# Altium PCB lab.PcbDoc
Units mm, origin at the board's own origin, x right, y up, seen from the top; angles counter-clockwise.
Board outline 122.94 x 74.3 mm, 2 copper layers (Top Layer, Bottom Layer), stack 1.1 mm thick; 25 components, 16 nets, 57 pads, 4 vias.
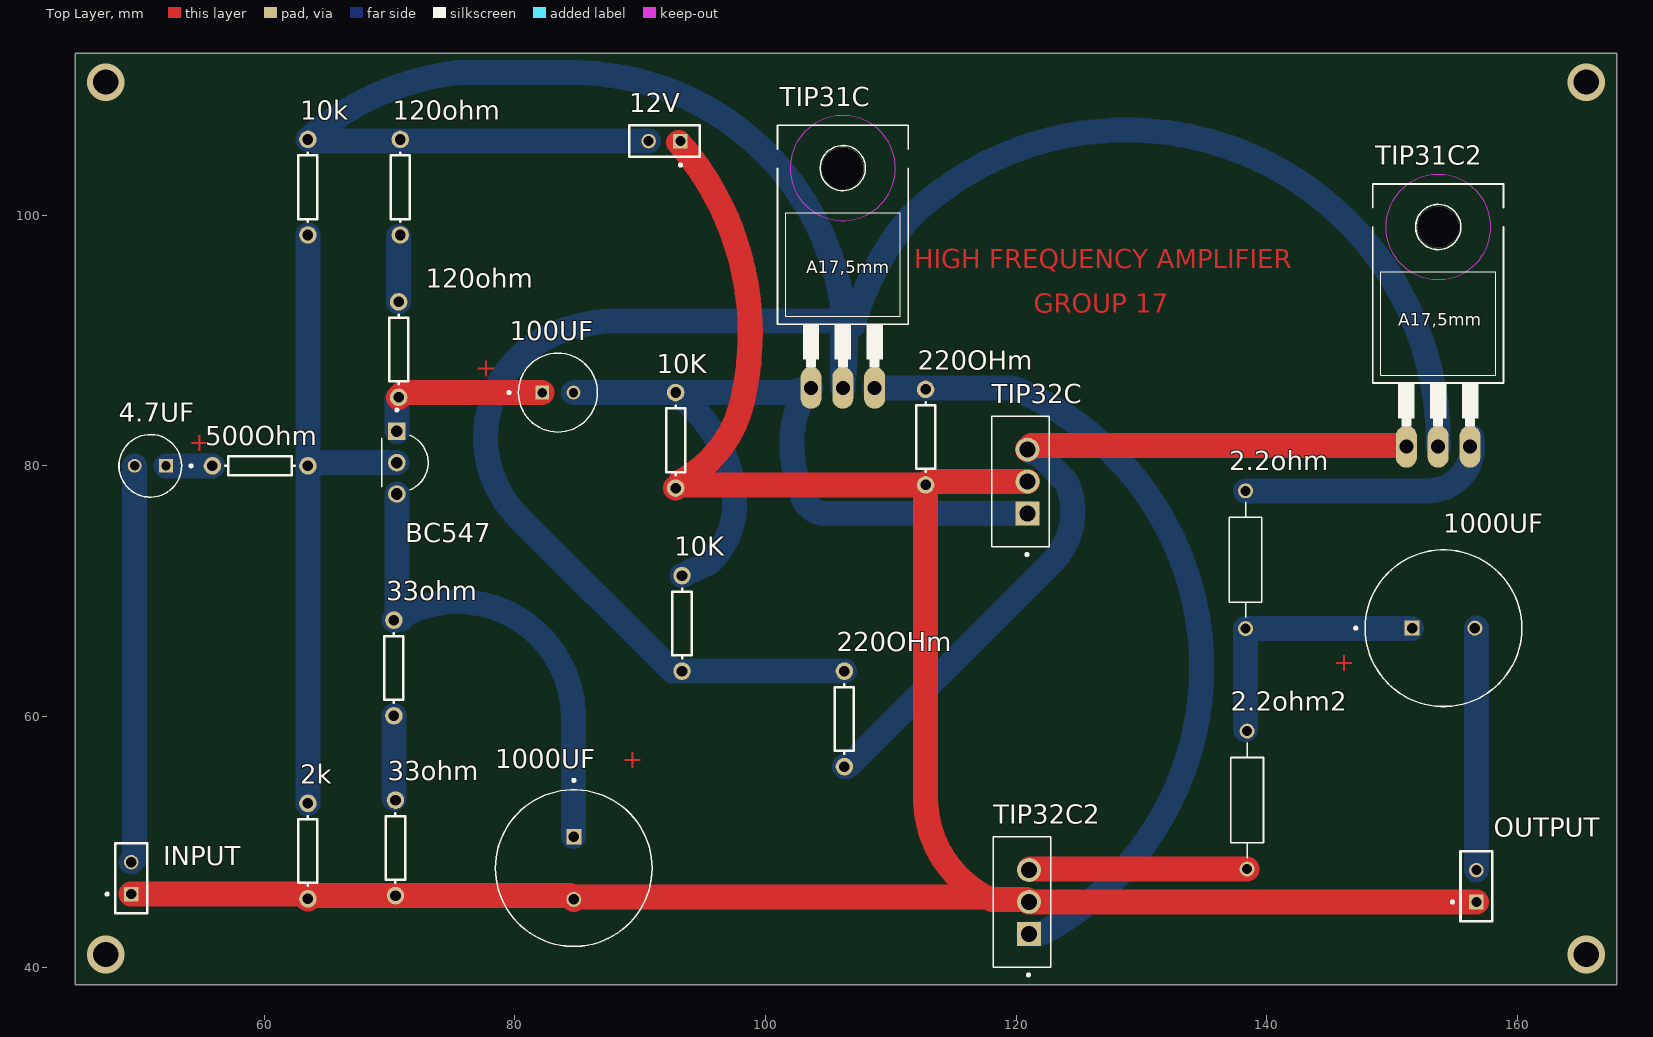
[diagram p0: Top Layer view]
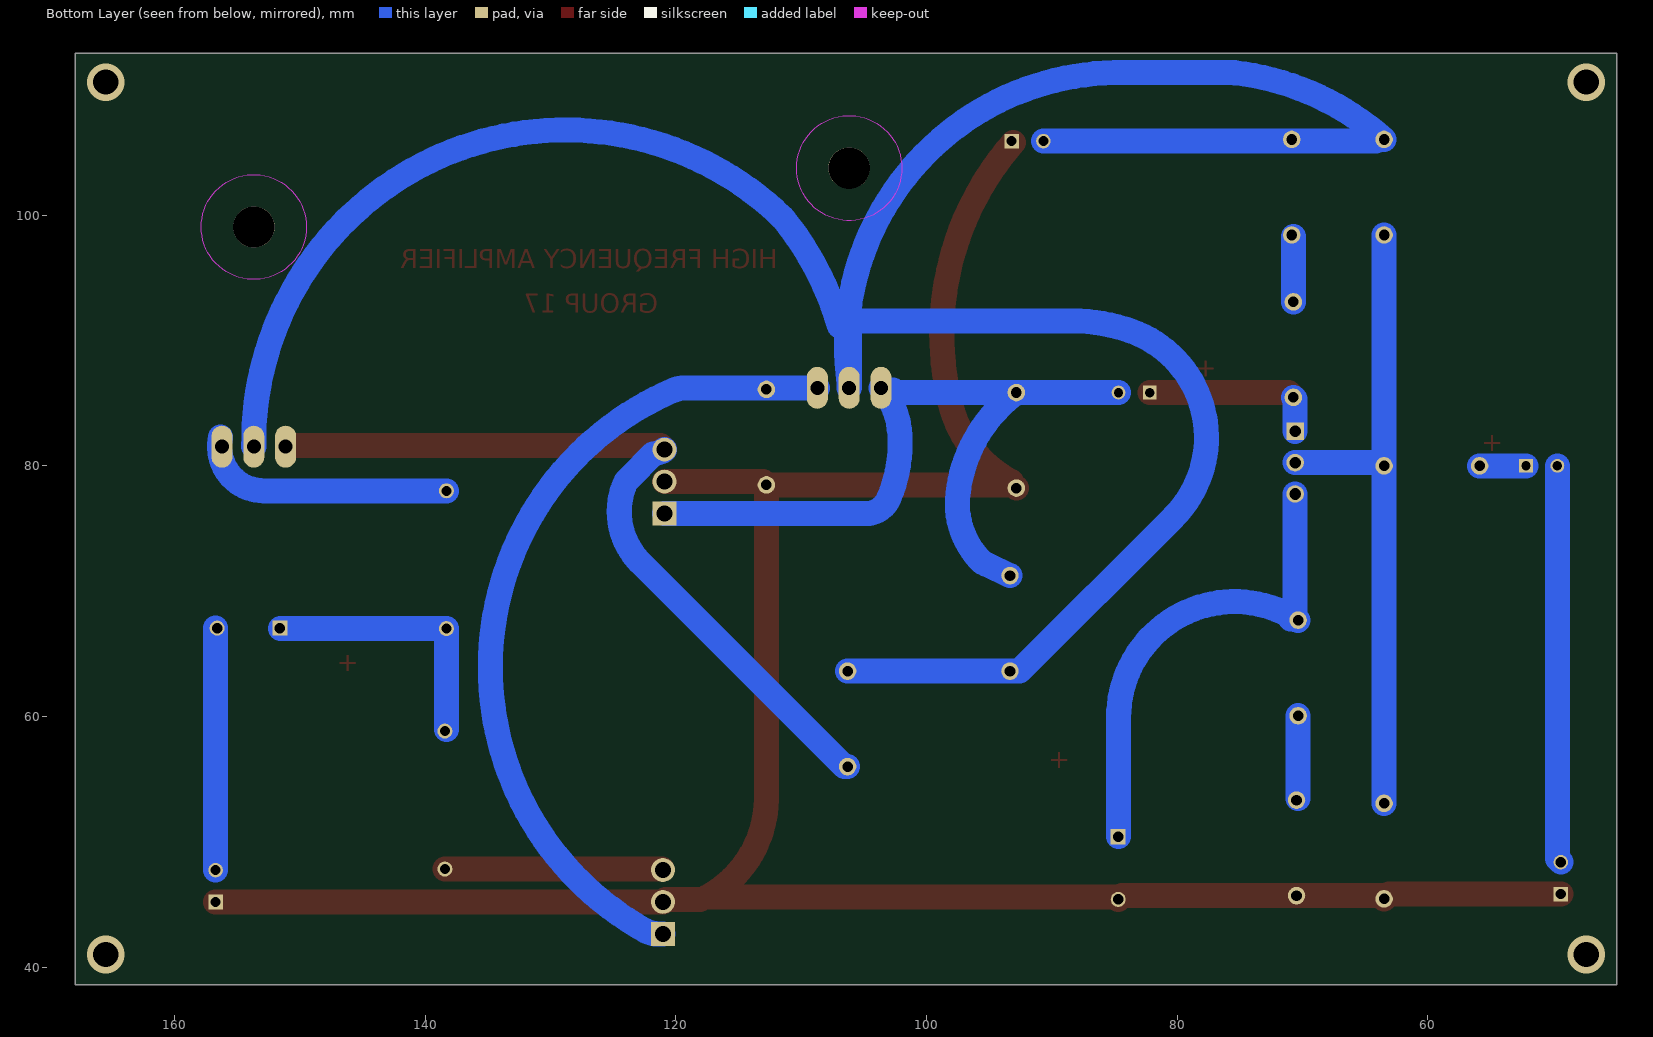
[diagram p1: Bottom Layer view, seen from below]

## Layer stack, top to bottom
Top Solder: solder mask 0.05, Solder Resist, Dk 3.5
Top Layer: signal copper 0.1
Dielectric 1: dielectric 0.9, FR-4, Dk 4.8
Bottom Layer: signal copper 0.1
Bottom Solder: solder mask 0.05, Solder Resist, Dk 3.5

## Board outline
44.958,38.608 167.894,38.608 167.894,112.903 44.958,112.903

## Design rules (kind name [scope] priority, off if disabled: settings)
Clearance [All] p1: gap=0.241 ignorepadtopadclearanceinfootprint=FALSE
HoleSize [All] p1: absolutevalues=TRUE maxlimit=3.302 minlimit=0.025 maxpercent=80.000 minpercent=20.000
PolygonConnect [All] p1: connectstyle=Relief reliefconductorwidth=0.254 reliefentries=4 polygonreliefangle="90 Angle" airgapwidth=0.254
RoutingVias [All] p1: holewidth=1 width=2 viastyle="Through Hole" minholewidth=0.25 minwidth=0.25 maxholewidth=2 maxwidth=3
SilkToSilkClearance [All] p1: silktosilkclearance=0.133
SilkToSolderMaskClearance [IsPad] p1: minsilkscreentomaskgap=0 clearancetoexposedcopper=TRUE
SolderMaskExpansion [All] p1: expansion=0.102 istentingtop=FALSE
Width [All] p1: maxlimit=2 minlimit=0.1 preferedwidth=2
27 further rules are at their usual default settings.

## Classes and differential pairs
component class lab: 2.2ohm 2.2ohm2 2k 4.7UF 10K 10k 12V 33ohm 100UF 120ohm 220OHm 500Ohm 1000UF BC547 input OUTPUT TIP31C TIP31C2 TIP32C TIP32C2

## Components (designator, comment, footprint, x,y, rotation, side; value= is the part's Value field where it differs from the comment)
2.2ohm "MFR-25FBF52-196K" RESAD1100W55L680D260 138.303,72.517 r90 top
2.2ohm2 "MFR-25FBF52-196K" RESAD1100W55L680D260 138.43,53.34 r90 top
2k "Res3" AXIAL-0.3 63.5,49.276 r90 top value=2K
4.7UF "EEUEB1J4R7H" CAPPRD250W50D500H1500 50.927,80.01 r180 top
10k "Res2" AXIAL-0.3 63.5,102.235 r90 top value=10K
10K "Res9" AXIAL-0.3 92.837,82.042 r90 top value=10K
10K "Res8" AXIAL-0.3 93.345,67.437 r270 top value=10K
12V "CES-101-01-G-D" SAMTEC_CES-101-01-G-D 93.218,105.918 r90 top
33ohm "Res5" AXIAL-0.3 70.485,49.53 r90 top value=33ohm
33ohm "Res4" AXIAL-0.3 70.358,63.881 r90 top value=33ohm
100UF "EEUEB1E101" CAPPRD250W50D630H1500 83.439,85.852 r0 top
120ohm "Res7" AXIAL-0.3 70.866,102.235 r90 top value=120ohm
120ohm "Res6" AXIAL-0.3 70.739,89.281 r90 top value=120ohm
220OHm "Res10" AXIAL-0.3 112.776,82.296 r90 top value=330ohm (schematic designator 330ohm)
220OHm "Res11" AXIAL-0.3 106.299,59.817 r90 top value=330ohm (schematic designator 330ohm)
500Ohm "Res1" AXIAL-0.3 59.69,80.01 r0 top (schematic designator 440ohm)
1000UF "EEUTA1E102LB" CAPPRD500W60D1250H2500 154.091,67.056 r0 top
1000UF "EEUTA1E102LB" CAPPRD500W60D1250H2500 84.709,47.919 r270 top
BC547 "BC547A" TO92250P510H770-3 71.247,80.264 r270 top
INPUT "CES-101-01-G-D" SAMTEC_CES-101-01-G-D 49.403,45.847 r0 top (schematic designator input)
OUTPUT "CES-101-01-G-D" SAMTEC_CES-101-01-G-D 156.718,45.212 r0 top
TIP31C "TIP31C" TO220 106.172,92.583 r0 top
TIP31C2 "TIP31C" TO220 153.67,87.884 r0 top
TIP32C "TIP32C" TO255P1040X460X1968-3 120.904,78.75 r90 top
TIP32C2 "TIP32C" TO255P1040X460X1968-3 121.031,45.222 r90 top

## Footprints (in the part's own frame and the unit in brackets; to place one, negate y for a bottom-side part, rotate by r counter-clockwise, add the part's x,y. Pads: shape width x height; smd on the part's side, far side on the other; paste and mask are expansions set on the pad)
AXIAL-0.3 [mm] "Axial Device, Thru-Hole; 2 Leads; 0.3 in Pin Spacing"
  round 1.4 hole 0.85: 1(-3.81,0) 2(3.81,0)
  silkscreen extent -2.77,-0.76 2.77,0.76
CAPPRD250W50D500H1500 [mm]
  round 1.1 hole 0.75: N(1.25,0)
  rect 1.1x1.1 / inner round 1.1 / far side rect 1.1x1.1 hole 0.75: P(-1.25,0)
  silkscreen extent -3.35,-2.5 2.5,2.5, body extent -2.5,-2.5 2.5,2.5, height 15
CAPPRD250W50D630H1500 [mm]
  round 1.1 hole 0.75: N(1.25,0)
  rect 1.1x1.1 / inner round 1.1 / far side rect 1.1x1.1 hole 0.75: P(-1.25,0)
  silkscreen extent -4,-3.15 3.15,3.15, body extent -3.15,-3.15 3.15,3.15, height 15
CAPPRD500W60D1250H2500 [mm]
  round 1.2 hole 0.85: N(2.5,0)
  rect 1.2x1.2 hole 0.85: P(-2.5,0)
  silkscreen extent -7.1,-6.25 6.25,6.25, body extent -6.25,-6.25 6.25,6.25, height 25
RESAD1100W55L680D260 [mm]
  round 1.2 hole 0.8: 1(-5.5,0) 2(5.5,0)
  silkscreen extent -4.58,-1.3 4.58,1.3
SAMTEC_CES-101-01-G-D [mm]
  rect 1.16x1.16 hole 0.81: 01(0,0)
  round 1.16 hole 0.81: 02(0,2.54)
  silkscreen extent -2.02,-1.53 1.27,4.07
TO220 [mil]
  oval 66x132 hole 44: 1(-100,-250) 2(0,-250) 3(100,-250)
  round 130 hole 130 unplated: ""(0,440)
  Keep-Out Layer circle w0: c0,440 r165
  Keep-Out Layer circle w0: c0,440 r165
  silkscreen extent -205,-185 205,575
TO255P1040X460X1968-3 [mm]
  rect 1.905x1.905 hole 1.27: 1(-2.55,0)
  round 1.905 hole 1.27: 2(0,0) 3(2.55,0)
  silkscreen extent -5.92,-1.74 5.2,2.86
TO92250P510H770-3 [mm]
  rect 1.4x1.4 hole 0.93: 1(-2.5,-0.655)
  round 1.4 hole 0.93: 2(0,-0.655) 3(2.5,-0.655)
  silkscreen extent -4.3,-1.85 2.18,1.85, body extent -2.4,-1.53 2.4,2.4, height 8

## Part data
2.2ohm 2.2ohm2: "RES 280K OHM 1/4W 1% AXIAL", Package=None, Availability=Unavailable, MP=MFR-25FBF52-196K, Price=None
2k 10k 10K 10K 33ohm 33ohm 120ohm 120ohm 220OHm 220OHm: library part Res1, "Resistor", LatestRevisionDate=17-Jul-2002, LatestRevisionNote="Re-released for DXP Platform.", PackageDescription="Axial Device, Thru-Hole; 2 Leads; 0.3 in Pin Spacing", PackageReference=AXIAL-0.3, Published=8-Jun-2000, Publisher="Altium Limited"
4.7UF: "CAP ALUM 4.7UF 20% 63V RADIAL", Package="RADIAL-2 Panasonic", Availability="In Stock", Check_prices=https://www.snapeda.com/parts/EEUEB1J4R7H/Panasonic/view-part/?ref=eda, MF=Panasonic, MP=EEUEB1J4R7H, Price=None, Purchase-URL=https://pricing.snapeda.com/search/part/EEUEB1J4R7H/?ref=eda, SnapEDA_Link=https://www.snapeda.com/parts/EEUEB1J4R7H/Panasonic/view-part/?ref=snap
12V INPUT OUTPUT: Package=None, Availability=Unavailable, MP=CES-101-01-G-D, Price=None
100UF: "CAP ALUM 100UF 20% 25V RADIAL", Package="RADIAL-2 Panasonic", Availability="In Stock", Check_prices=https://www.snapeda.com/parts/EEUEB1E101/Panasonic/view-part/?ref=eda, MF=Panasonic, MP=EEUEB1E101, Price=None, Purchase-URL=https://pricing.snapeda.com/search/part/EEUEB1E101/?ref=eda, SnapEDA_Link=https://www.snapeda.com/parts/EEUEB1E101/Panasonic/view-part/?ref=snap
500Ohm: "Resistor", LatestRevisionDate=17-Jul-2002, LatestRevisionNote="Re-released for DXP Platform.", PackageDescription="Axial Device, Thru-Hole; 2 Leads; 0.3 in Pin Spacing", PackageReference=AXIAL-0.3, Published=8-Jun-2000, Publisher="Altium Limited", R1=440ohm
1000UF 1000UF: "CAP ALUM 1000UF 20% 25V RADIAL", Package="RADIAL-2 Panasonic", Availability="No availability data", Check_prices=https://www.snapeda.com/parts/EEUTA1E102LB/Panasonic/view-part/5789306/?ref=eda, MF=Panasonic, MP=EEUTA1E102LB, Price=None, SnapEDA_Link=https://www.snapeda.com/parts/EEUTA1E102LB/Panasonic/view-part/5789306/?ref=snap
BC547: "Bipolar (BJT) Transistor NPN 45 V 100 mA 300MHz 625 mW Through Hole TO-92 (TO-226)", Package="E-PKG AXIAL-LEADED-2 ON Semiconductor", Availability="In Stock", Check_prices=https://www.snapeda.com/parts/BC547A/Onsemi/view-part/?ref=eda, MF="ON Semiconductor", MP=BC547A, Price=None, Purchase-URL=https://pricing.snapeda.com/search/part/BC547A/?ref=eda, SnapEDA_Link=https://www.snapeda.com/parts/BC547A/Onsemi/view-part/?ref=snap
TIP31C TIP31C2: "Bipolar _BJT_ Transistor NPN 100V 3A 3MHz 2W Through Hole TO-220AB", Package="TO-220 Multicomp", Availability=Unavailable, MF="Renesas Electronics", MP=TIP31C, Price=None, SnapEDA_Link=https://www.snapeda.com/parts/TIP31C/Renesas%20Electronics%20America%20Inc./view-part/1915707/?ref=snap
TIP32C TIP32C2: "BIPOLAR TRANSISTOR, PNP, -100V, TO-220; Transistor Polarity: P Channel; Collector Emitter Voltage V(br)ceo: -100V; Tr...", Package="TO-220-3 Central Semiconductor", Availability="Not in stock", Check_prices=https://www.snapeda.com/parts/TIP32C/Central+Semiconductor+Corp/view-part/?ref=eda, MF="Central Semiconductor", MP=TIP32C, Price=None, SnapEDA_Link=https://www.snapeda.com/parts/TIP32C/Central+Semiconductor+Corp/view-part/?ref=snap

## Via types
v1: diameter 3, hole 2, Top Layer to Bottom Layer, 4 vias

## Nets (pads, with @x,y where several pads share a name; then routed paths per layer and width w, separated by ;. In a path a pad name is that pad's centre, name@x,y a point inside that pad or via, vN(x,y) a via of type N, cw(c..) or ccw(c..) an arc to the next point about the centre after c; other vN are vias at no path point)
"1 net": 10K.1@93.345,71.247 10K.2@92.837,85.852 100UF.N TIP31C.1 TIP32C.1 | length 64.9
  Bottom Layer w2: 100UF.N 10K.2@92.837,85.852 ; 10K.1@93.345,71.247 95.233,72.144 95.545,72.293 ccw(c90.94,77.023) 97.501,77.754 ccw(c85.882,76.454) 10K.2@92.837,85.852 ; TIP32C.1 104.845,76.2 104.84,76.2 cw(c104.845,78.2) 103.003,77.419 cw(c113.362,81.792) 102.175,82.922 102.176,82.929 cw(c108.002,82.334) TIP31C.1 103.47,86.071 102.68,86.071 102.46,85.852 94.625,85.852 94.364,85.852 10K.2@92.837,85.852
"2 net": 220OHm.2@112.776,86.106 TIP31C.3 TIP32C2.1 | length 66.6
  Bottom Layer w2: TIP31C.3 112.776,86.233 119.301,86.233 cw(c119.301,84.233) 120.072,86.078 cw(c110.787,63.933) 122.411,42.921 cw(c121.445,44.672) 121.448,42.672 TIP32C2.1
"3 net": 2k.2 10k.1 500Ohm.2 BC547.2 | length 52.5
  Bottom Layer w2: 2k.2 500Ohm.2 ; 10k.1 500Ohm.2 ; BC547.2 63.754,80.264 500Ohm.2
"4 net": 120ohm.1@70.866,98.425 120ohm.2@70.739,93.091 | length 5.2
  Bottom Layer w2: 120ohm.2@70.739,93.091 120ohm.1@70.739,98.298
GND: 2k.1 10K.1@92.837,78.232 12V.01 33ohm.1@70.485,45.72 220OHm.1@112.776,78.486 1000UF.N@84.709,45.419 INPUT.01 OUTPUT.01 TIP32C2.2 TIP32C.2 | length 200.7
  Top Layer w2: INPUT.01 63.119,45.847 2k.1 63.754,45.72 70.485,45.72 84.408,45.72 84.709,45.419 84.885,45.595 117.528,45.595 cw(c121.784,53.536) 112.776,53.368 cw(c114.776,53.398) 112.776,53.393 220OHm.1@112.776,78.486 ; 10K.1@92.837,78.232 93.091,78.486 220OHm.1@112.776,78.486 ; 12V.01@93.083,105.8 cw(c75.617,90.573) 98.093,84.938 cw(c88.733,87.284) 10K.1@93.218,78.74 ; 118.075,45.419 120.834,45.419 TIP32C2.2 OUTPUT.01@156.708,45.222 ; TIP32C.2 113.04,78.75 220OHm.1@112.776,78.486
Net2.2ohm2_1: 2.2ohm2.1 TIP32C2.3 | length 17.3
  Top Layer w2: TIP32C2.3@121.099,47.84 2.2ohm2.1
Net2.2ohm2_2: 2.2ohm2.2 2.2ohm.1 1000UF.P@151.591,67.056 | length 21.3
  Bottom Layer w2: 2.2ohm2.2@138.303,58.967 2.2ohm.1 1000UF.P@151.552,67.017
Net2.2ohm_2: 2.2ohm.2 TIP31C2.3 | length 20.9
  Bottom Layer w2: 2.2ohm.2 152.87,78.017 ccw(c152.874,81.543) 156.395,81.732 ccw(c150.488,81.409) TIP31C2.3@156.337,82.296
Net33ohm_1: 33ohm.1@70.358,60.071 33ohm.2@70.485,53.34 | length 6.6
  Bottom Layer w2: 33ohm.2@70.358,53.467 33ohm.1@70.358,60.071
Net33ohm_2: 33ohm.2@70.358,67.691 1000UF.P@84.709,50.419 BC547.3 | length 39.9
  Bottom Layer w2: BC547.3 70.592,67.925 70.358,67.691 70.656,67.747 33ohm.2@70.972,67.806 ; 33ohm.2@70.612,67.818 cw(c75.433,59.925) 84.681,59.925 1000UF.P@84.681,50.427
"Net 5": 100UF.P 120ohm.1@70.739,85.471 BC547.1 | length 14.4
  Top Layer w2: 120ohm.1@70.739,85.471 71.12,85.852 100UF.P
  Bottom Layer w2: BC547.1 70.592,85.324 120ohm.1@70.739,85.471
"Net 6": 4.7UF.P 500Ohm.1 | length 3.7
  Bottom Layer w2: 4.7UF.P 500Ohm.1
NetLabel16: 220OHm.1@106.299,56.007 TIP31C2.1 TIP32C.3 | length 64.5
  Top Layer w2: TIP32C.3 121.224,81.62 TIP31C2.1@150.968,81.62
  Bottom Layer w2: 220OHm.1@106.299,56.007 106.553,56.007 122.821,72.275 122.823,72.277 ccw(c118.749,76.357) 123.986,78.77 123.705,79.051 121.813,80.943 cw(c122.067,82.927) 120.915,81.292 TIP32C.3
NetLabel17: 1000UF.N@156.591,67.056 OUTPUT.02 | length 19.3
  Bottom Layer w2: OUTPUT.02 1000UF.N@156.718,67.056
NetLabel18: 4.7UF.N INPUT.02 | length 31.7
  Bottom Layer w2: INPUT.02 49.677,48.661 4.7UF.N
VCC: 10k.2 10K.2@93.345,63.627 12V.02 120ohm.2@70.866,106.045 220OHm.2@106.299,63.627 TIP31C2.2 TIP31C.2 | length 232.1
  Bottom Layer w2: 10k.2 cw(c77.937,89.72) 75.412,111.366 cw(c75.637,109.379) 75.637,111.379 84.975,111.379 cw(c84.975,109.379) 85.01,111.379 cw(c84.589,89.587) 106.185,86.639 ccw(c108.167,86.372) TIP31C.2 ; 10k.2@64.135,105.918 70.866,105.918 12V.02 ; TIP31C.2@106.132,86.273 106.132,91.567 88.351,91.567 ccw(c88.351,77.69) 83.589,90.725 ccw(c86.683,82.265) 80.314,75.896 92.583,63.627 220OHm.2@106.299,63.627 ; 106.953,91.173 cw(c130.804,84.178) 111.329,99.622 ; 111.329,99.622 cw(c112.896,98.379) 111.501,99.813 cw(c128.795,81.929) TIP31C2.2
pads on no net: TIP31C2. TIP31C.
copper on no net:
  other v1: 47.371,41.021 165.481,41.021 47.371,110.617 165.481,110.617

## Other copper
Top Layer:
  text "HIGH FREQUENCY AMPLIFIER" at 111.887,95.758 h1.52
  text "GROUP 17" at 121.412,92.202 h1.52
  text "+" at 76.835,87.122 h1.52
  text "+" at 53.975,81.153 h1.52
  text "+" at 145.288,63.627 h1.52
  text "+" at 88.519,55.88 h1.52

## Text inside footprints (layer, text, board x,y; h text height)
TIP31C: Top Overlay "A17,5mm" at 103.251,95.377 h0.99; Mechanical 13 "3" at 108.079,92.583 h1.27; Mechanical 13 "2" at 105.537,92.583 h1.27; Mechanical 13 "1" at 102.991,92.583 h1.27
TIP31C2: Top Overlay "A17,5mm" at 150.495,91.186 h0.99; Mechanical 13 "3" at 155.577,87.884 h1.27; Mechanical 13 "2" at 153.035,87.884 h1.27; Mechanical 13 "1" at 150.489,87.884 h1.27